# Allegro board DAC.brd
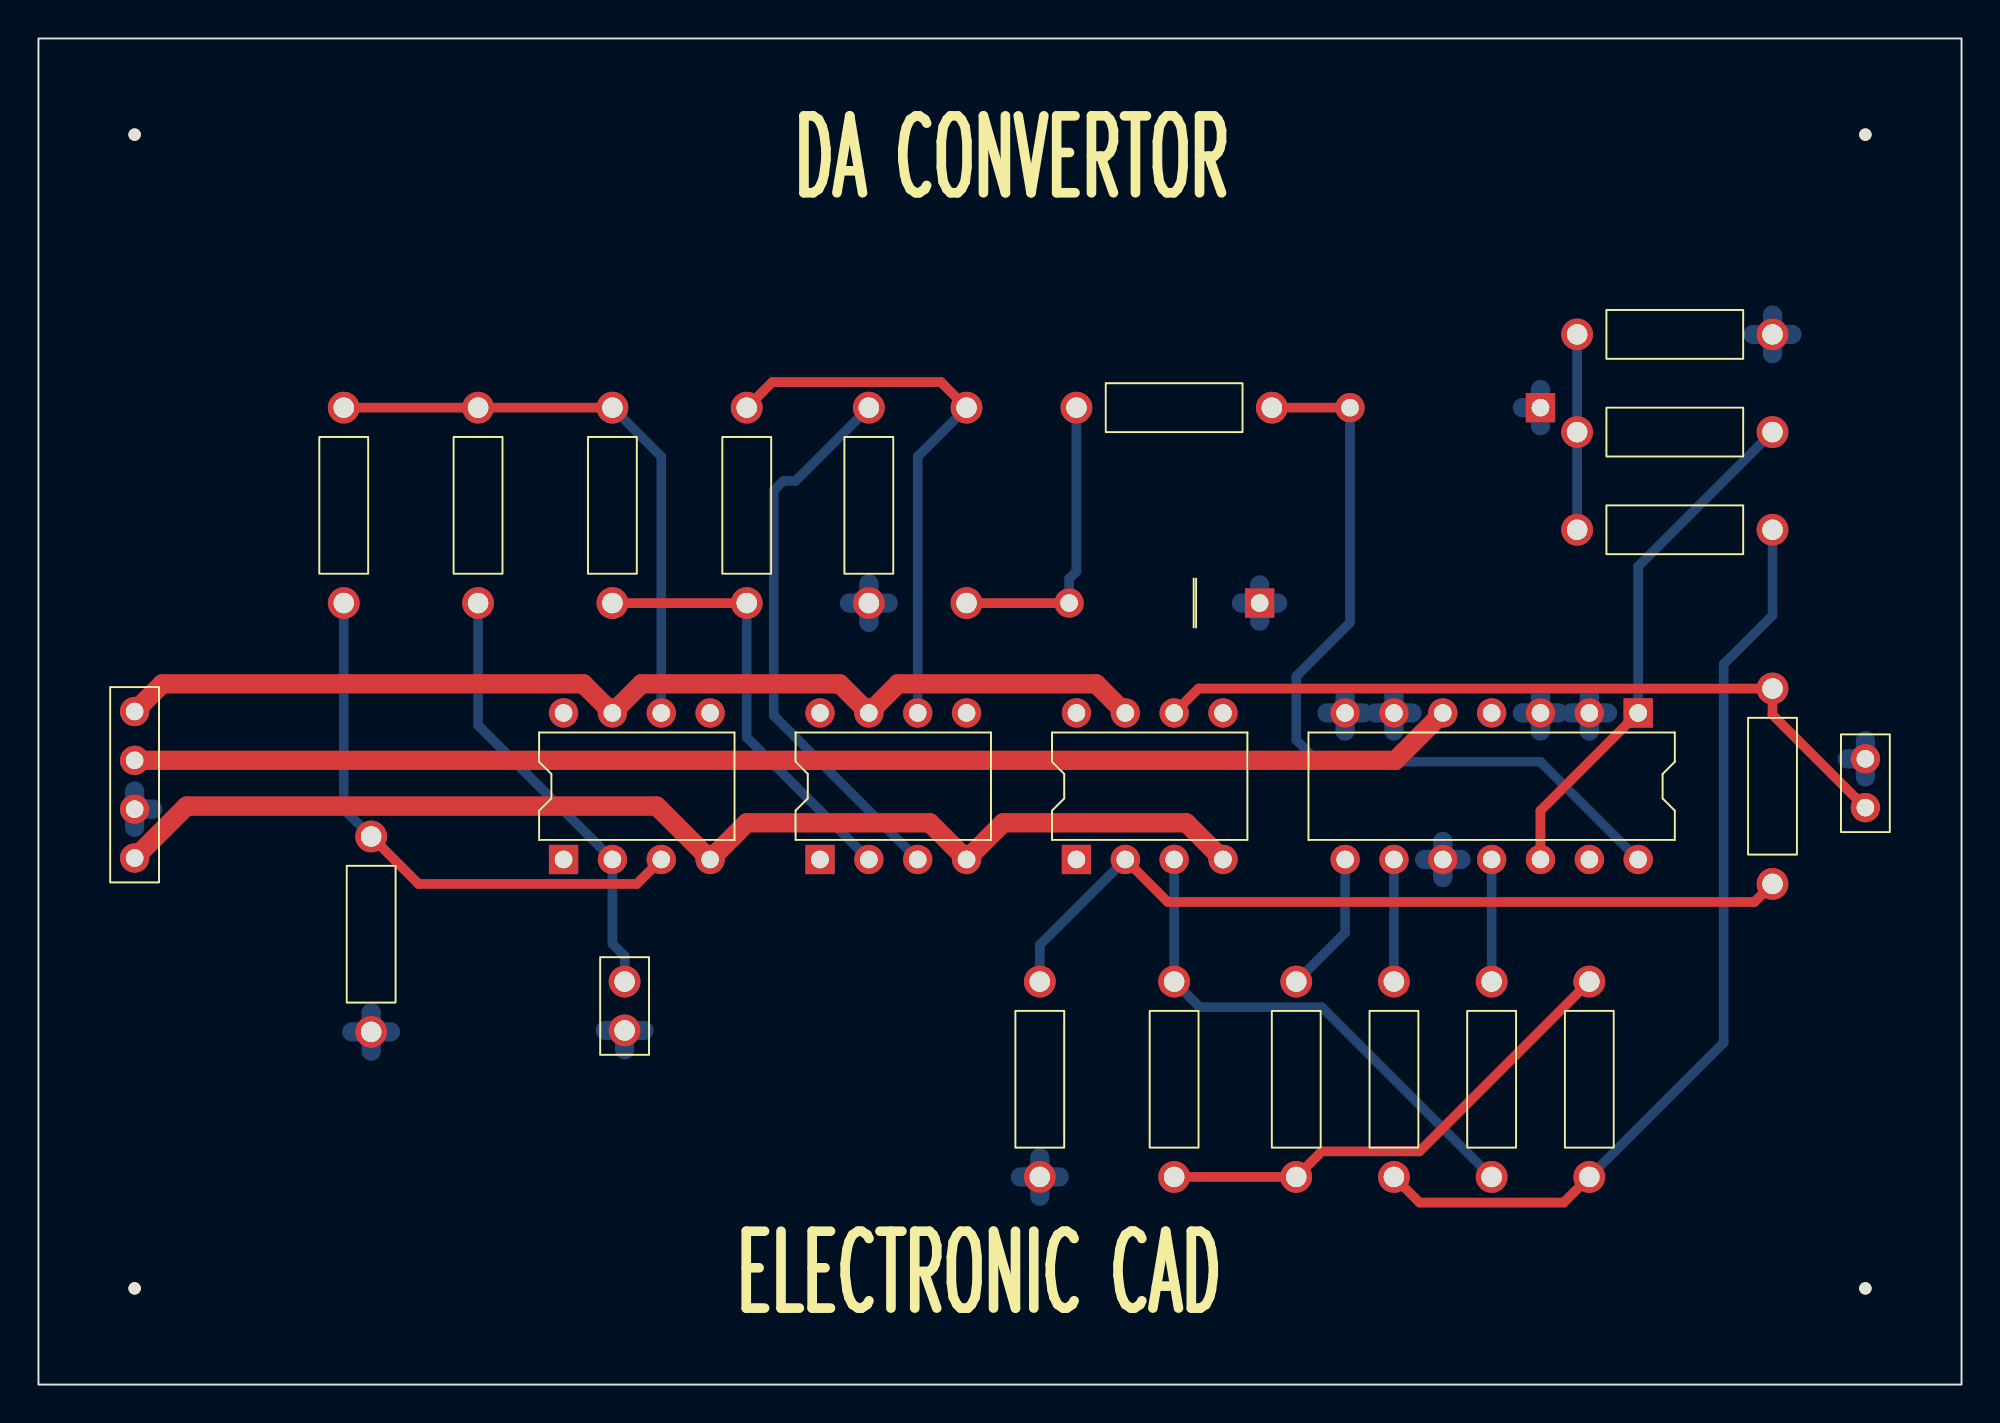
[diagram p0: board, top side]
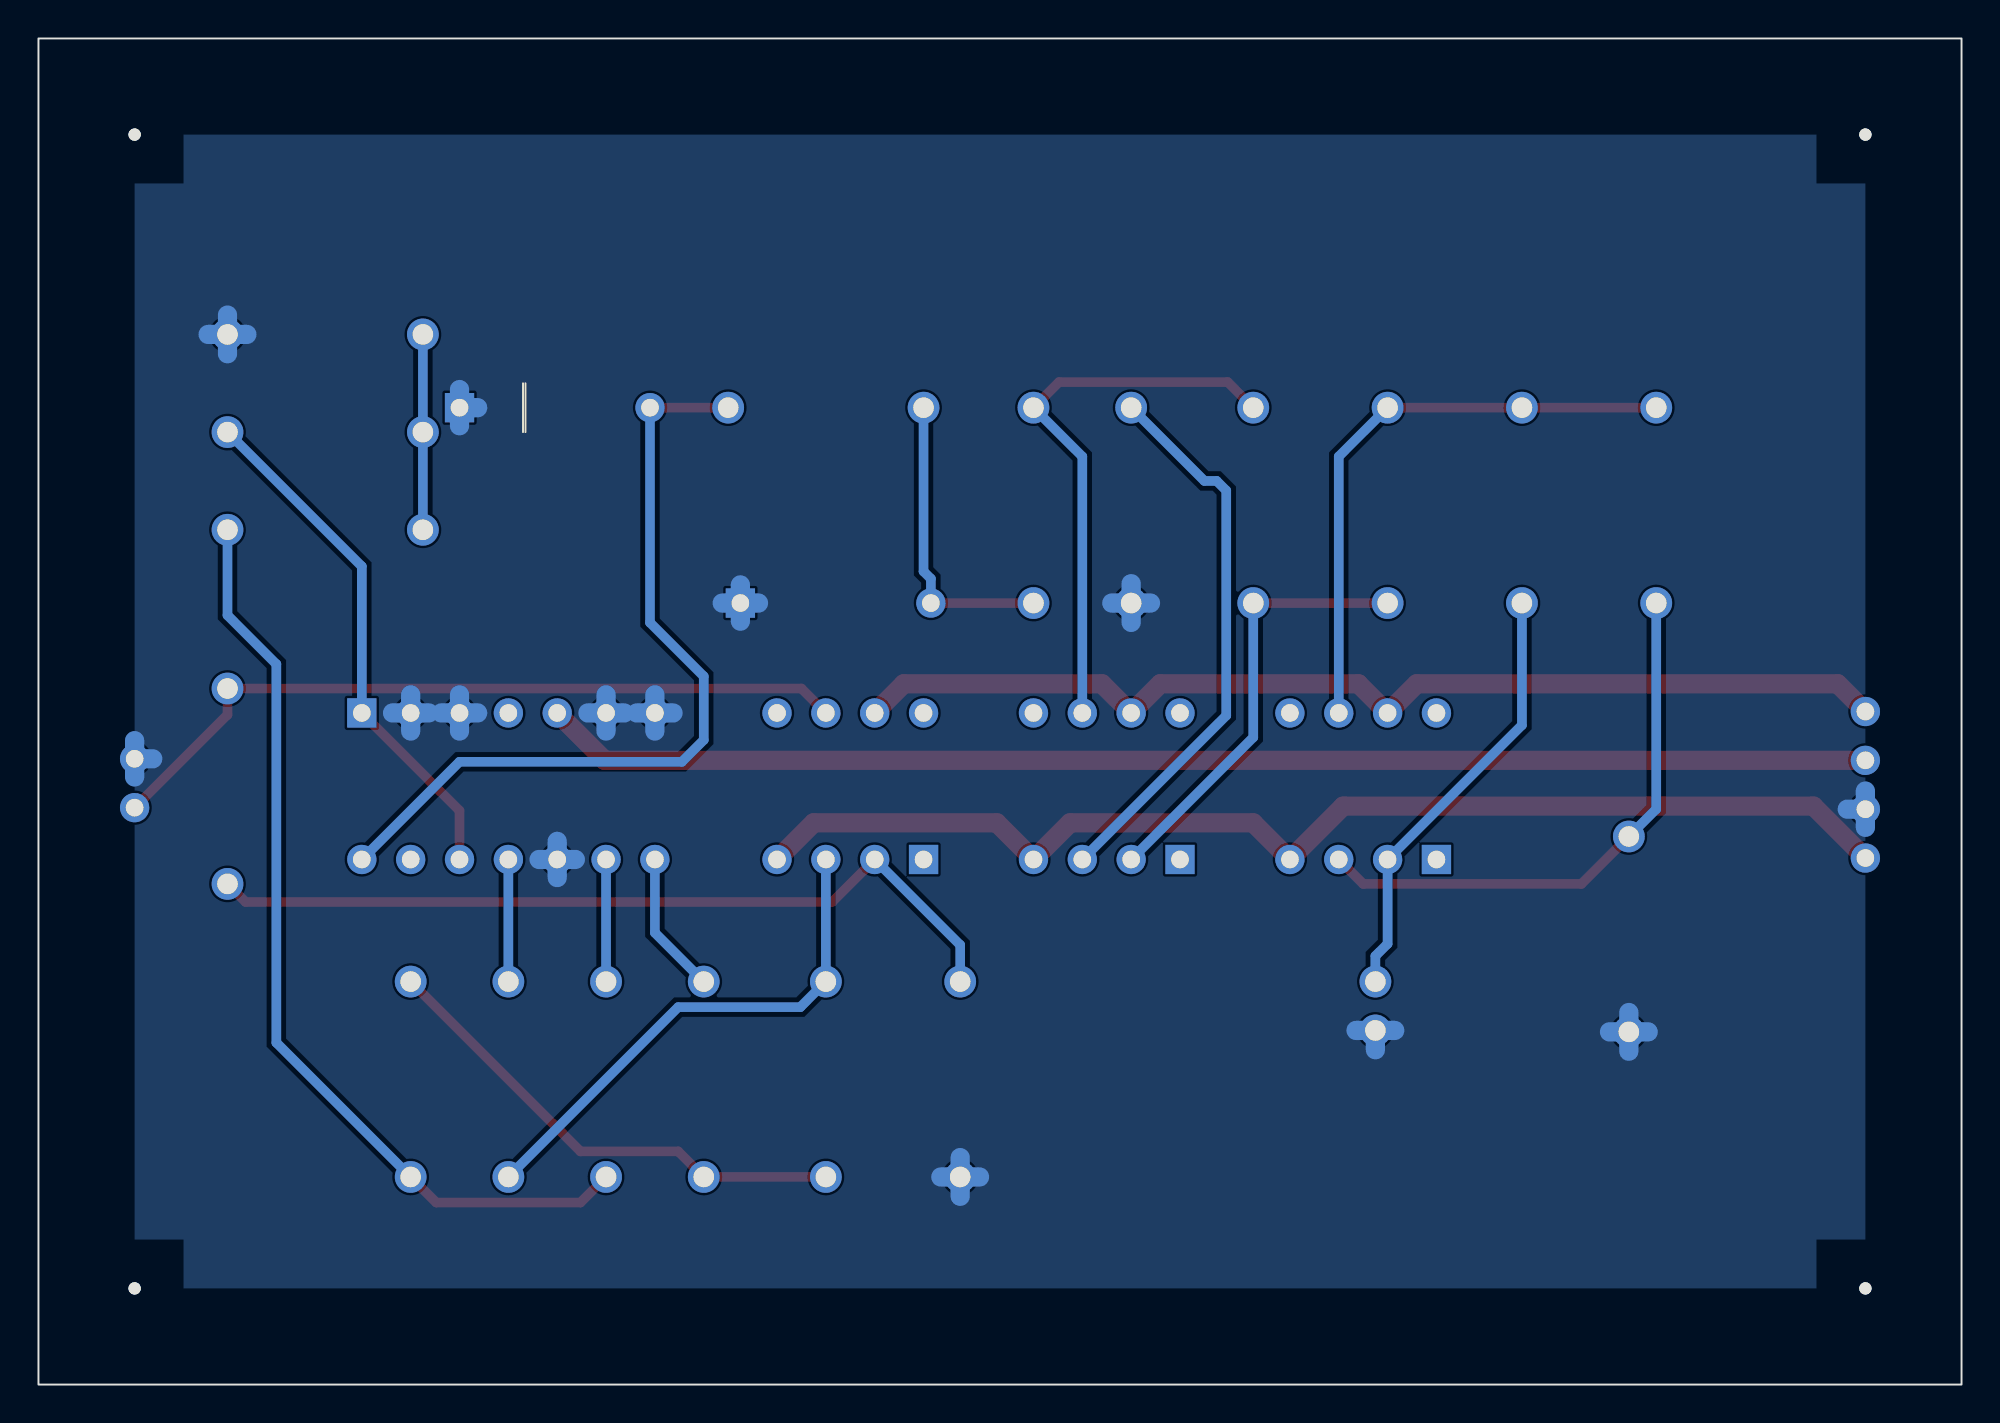
[diagram p1: board, bottom side, seen from below]

Outline 100 x 70 mm; copper layers: TOP, BOTTOM. Coordinates in mm from the lower left corner of the outline.
Outline path: rectangle 0,0 100,70

## Design rules (mm)
constraint set DEFAULT: min track width 0.5, pair gap 0.5
nets with their own width: min track width 1; nets +5V +12V -12V GND

## Placement (name value [footprint] x y rotation side)
C1  0.1uF  [CAPCK05]  30.48 20.95 180 top
D1  D1N4148  [DO41]  63.5 40.64 90 top
D2  RD 5.6A  [DO41]  78.11 50.8 270 bottom
J1  CON2  [JUMPER2]  95 30 90 top
J2  CON4  [JUMPER4]  5 35 270 top
NOREF  -  [unnamed]  5 5 0 top
NOREF#2  -  [unnamed]  5 65 0 top
NOREF#3  -  [unnamed]  95 5 0 top
NOREF#4  -  [unnamed]  95 65 0 top
NOREF#5  -  [#2]  100 0 90 top
NOREF#6  -  [#2]  0 70 0 top
R1  10K  [RES400]  22.86 40.64 0 top
R2  5.1K  [RES400]  36.83 40.64 0 top
R3  10K  [RES400]  29.84 50.8 180 top
R4  1K  [RES400]  48.26 50.8 180 top
R5  1K  [RES400]  53.98 50.8 270 top
R6  10K  [RES400]  43.18 50.8 180 top
R7  3.8K  [RES400]  15.88 40.64 0 top
R8  1K  [RES400]  17.3 28.5 180 top
R9  22K  [RES400]  75.56 20.95 180 top
R10  22K  [RES400]  90.17 26.04 0 top
R11  10K  [RES400]  59.05 20.95 180 top
R12  22K  [RES400]  65.41 20.95 180 top
R13  10K  [RES400]  80.64 20.95 180 top
R14  22K  [RES400]  70.48 20.95 180 top
R15  10K  [RES400]  90.17 44.45 90 top
R16  10K  [RES400]  52.07 20.95 180 top
R17  22K  [RES400]  90.17 49.53 90 top
R18  10K  [RES400]  80.01 54.61 270 top
U1  LM741  [DIP8_3]  27.3 27.3 90 top
U2  LM741  [DIP8_3]  40.64 27.3 90 top
U3  74LS90  [DIP14_3]  83.19 34.92 270 top
U4  LM741  [DIP8_3]  53.98 27.3 90 top

## Library data of the parts
C1 = CAP NP: Tolerance: ***; User Part Number: ***
D1 = 1N4148
D2 = RD100EB
J1 = CON2: User Part Number: ***
J2 = CON4: User Part Number: ***
R1-R18 = R: Tolerance: ***; User Part Number: ***
U1 = LM741_0: Tolerance: ***; User Part Number: ***
U2 = LM741_1: Tolerance: ***; User Part Number: ***
U3 = 74LS90_2: Tolerance: ***; User Part Number: ***
U4 = LM741_2: Tolerance: ***; User Part Number: ***

## Footprints (pads in the part's own frame, mm; a bottom-side part is the same pattern mirrored in y, then rotated)
CAPCK05
  round 1.651 hole 1.067: 1(0,0) 2(0,2.54)
DIP8_3
  rect 1.524x1.524 hole 0.914: 1(0,0)
  round 1.524 hole 0.914: 2(0,-2.54) 3(0,-5.08) 4(0,-7.62) 5(7.62,-7.62) 6(7.62,-5.08) 7(7.62,-2.54) 8(7.62,0)
DIP14_3
  rect 1.524x1.524 hole 0.914: 1(0,0)
  round 1.524 hole 0.914: 2(0,-2.54) 3(0,-5.08) 4(0,-7.62) 5(0,-10.16) 6(0,-12.7) 7(0,-15.24) 8(7.62,-15.24) 9(7.62,-12.7) 10(7.62,-10.16) 11(7.62,-7.62) 12(7.62,-5.08) 13(7.62,-2.54) 14(7.62,0)
DO41
  rect 1.524x1.524 hole 0.914: 1(0,0)
  round 1.524 hole 0.914: 2(0,9.906)
JUMPER2
  round 1.524 hole 0.914: 1(0,0) 2(2.54,0)
JUMPER4
  round 1.524 hole 0.914: 1(0,0) 2(2.54,0) 3(5.08,0) 4(7.62,0)
RES400
  round 1.651 hole 1.067: 1(0,0) 2(0,10.16)
unnamed
  round 0.635 hole 3.175 unplated: (0,0)

## Nets
+5V: J2.2 U3.5
+12V: J2.1 U1.7 U2.7 U4.7
-12V: J2.4 U1.4(V-) U2.4(V-) U4.4(V-)
GND: C1.2 D1.1 D2.1 J1.2 J2.3 R6.2 R8.2 R16.2 R18.2 U3.2 U3.3 U3.6 U3.7(R92) U3.10
CLK: D2.2 R5.2 U3.14
OUT: J1.1 R10.2 U4.6
SIG: R9.2 R11.1 U4.3
N00419: C1.1 R1.1 U1.2
N00446: R1.2 R3.1 R7.2 U1.6
N00458: R7.1 R8.1 U1.3
N01062: R2.1 R3.2 U2.2
N01190: R6.1 U2.3
N01334: R2.2 R4.1 U2.6
N01395: D1.2 R4.2 R5.1
N01912: R17.1 U3.1 U3.12
N02047: R14.1 U3.9
N02070: R12.1 U3.8
N02099: R9.1 U3.11
N02203: R11.2 R12.2 R13.1
N02207: R13.2 R14.2 R15.1
N02211: R15.2 R17.2 R18.1
N02963: R10.1 R16.1 U4.2

Pads without a net: U1 1 5 8; U2 1 5 8; U3 4 13; U4 1 5 8

## Routing (per net, layer and track width the routed paths; a pad name or vN(x,y) marks a point on that pad's centre or on a via; arc(x,y) is an arc through that point)
+5V: length 69
  TOP w1: J2.2 70.56,32.46 U3.5
+12V: length 55.3
  TOP w1: U4.7 55,36.44 44.7,36.44 U2.7 41.66,36.44 31.36,36.44 U1.7 28.33,36.44 6.44,36.44 J2.1
-12V: length 62
  TOP w1: J2.4 7.7,30.08 32.15,30.08 U1.4 36.83,29.21 46.35,29.21 U2.4 50.16,29.21 59.69,29.21 U4.4
GND: length 50.2
  BOTTOM w1: U3.6 70.48,35.87 ; U3.6 69.54,34.92 ; U3.6 70.48,33.98 ; U3.6 71.43,34.92 ; 67.94,33.98 67.94,34.92 ; 67.94,34.92 68.89,34.92 ; 67.94,34.92 67.94,35.87 ; 67.94,34.92 67,34.92 ; R8.2 18.31,18.34 ; R8.2 16.29,18.34 ; R8.2 17.3,17.33 ; R8.2 17.3,19.35 ; U3.3 79.05,34.92 ; U3.3 77.16,34.92 ; U3.3 78.11,33.98 ; U3.3 78.11,35.87 ; 77.16,50.8 D2.1 ; D2.1 78.11,49.86 ; D2.1 78.11,51.74 ; 51.06,10.79 52.07,10.79 ; 52.07,10.79 52.07,11.8 ; 52.07,10.79 52.07,9.79 ; 52.07,10.79 53.08,10.79 ; D1.1 63.5,41.58 ; D1.1 64.44,40.64 ; D1.1 62.56,40.64 ; D1.1 63.5,39.7 ; J2.3 5,30.86 ; J2.3 5.94,29.92 ; J2.3 5,28.98 ; U3.2 80.64,35.87 ; U3.2 79.7,34.92 ; U3.2 81.59,34.92 ; U3.2 80.64,33.98 ; R6.2 44.19,40.64 ; R6.2 42.17,40.64 ; R6.2 43.18,41.65 ; R6.2 43.18,39.63 ; U3.10 73.97,27.3 ; U3.10 72.08,27.3 ; U3.10 73.03,26.36 ; U3.10 73.03,28.25 ; C1.2 31.49,18.41 ; C1.2 29.47,18.41 ; C1.2 30.48,17.41 ; 90.17,53.6 R18.2 ; R18.2 91.18,54.61 ; R18.2 90.17,55.62 ; R18.2 89.16,54.61 ; 95,31.6 J1.2 ; J1.2 95,33.48 ; J1.2 94.06,32.54
CLK: length 42.9
  TOP w0.5: R5.2 D2.2
  BOTTOM w0.5: U3.14 78.11,32.38 66.54,32.38 65.41,33.52 65.41,36.83 68.2,39.62 D2.2
OUT: length 39.8
  TOP w0.5: U4.6 60.33,36.2 R10.2 90.17,34.83 J1.1
SIG: length 27.1
  BOTTOM w0.5: 75.56,10.79 66.73,19.62 60.38,19.62 R11.1 U4.3
N00419: length 22.8
  BOTTOM w0.5: C1.1 30.48,22.29 29.84,22.92 U1.2 22.86,34.29 R1.1
N00446: length 30.9
  TOP w0.5: R3.1 R1.2 R7.2
  BOTTOM w0.5: U1.6 32.38,48.26 R3.1
N00458: length 29.4
  TOP w0.5: R8.1 19.77,26.04 31.11,26.04 U1.3
  BOTTOM w0.5: R8.1 15.88,29.93 R7.1
N01062: length 23
  TOP w0.5: R3.2 R2.1
  BOTTOM w0.5: U2.2 36.83,33.66 R2.1
N01190: length 29
  BOTTOM w0.5: U2.3 38.23,34.79 38.23,46.49 38.73,46.99 39.37,46.99 R6.1
N01334: length 29.5
  TOP w0.5: R4.1 46.93,52.13 38.16,52.13 R2.2
  BOTTOM w0.5: U2.6 45.72,48.26 R4.1
N01395: length 15.7
  TOP w0.5: R4.2 D1.2
  BOTTOM w0.5: R5.1 53.98,42.29 53.59,41.91 D1.2
N01912: length 27.2
  TOP w0.5: U3.12 78.11,29.84 U3.1
  BOTTOM w0.5: R17.1 83.19,42.55 U3.1
N02047: length 6.4
  BOTTOM w0.5: U3.9 R14.1
N02070: length 7.4
  BOTTOM w0.5: R12.1 67.94,23.5 67.94,27.3
N02099: length 6.4
  BOTTOM w0.5: U3.11 R9.1
N02203: length 25.8
  TOP w0.5: 59.05,10.79 65.41,10.79 66.73,12.12 71.81,12.12 R13.1
N02207: length 48.9
  TOP w0.5: 70.48,10.79 71.81,9.46 79.31,9.46 80.64,10.79
  BOTTOM w0.5: R15.1 90.17,40.01 87.63,37.47 87.63,17.78 80.64,10.79
N02211: length 10.2
  BOTTOM w0.5: R18.1 R17.2 R15.2
N02963: length 43.2
  TOP w0.5: U4.2 58.73,25.09 89.23,25.09 R10.1
  BOTTOM w0.5: R16.1 52.07,22.86 U4.2

## Copper pours and planes (outline as drawn; the poured copper is in the pictures)
GND on BOTTOM: 5,5 5,65 95,65 95,5

## Text on the board
Ref Des/Silkscreen Top: ELECTRONIC CAD | DA CONVERTOR
DIMENSION: FIGURE | FINISHED_SIZE | 0.914 | 1.067 | 3.175 | DRILL CHART: TOP to BOTTOM | ALL UNITS ARE IN MILLIMETERS | PLATED | NON-PLATED | QTY | 48 | 38 | 4
